# EAGLE board MMA8452_I2C_Panel (EAGLE 7.6.0)
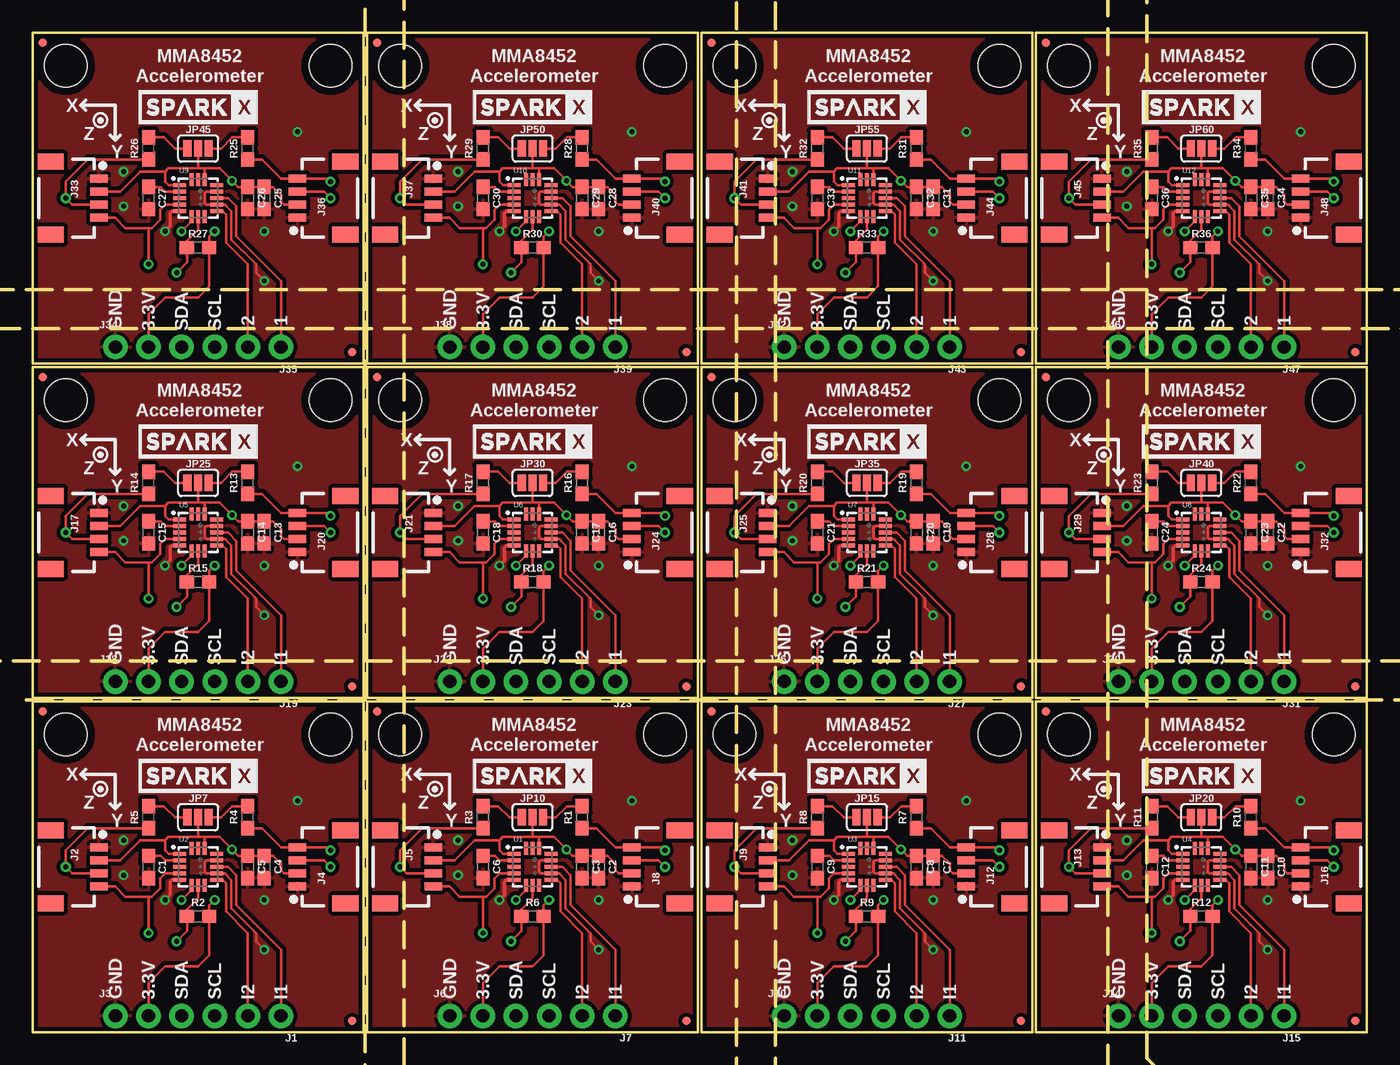
[diagram p0: board, top side]
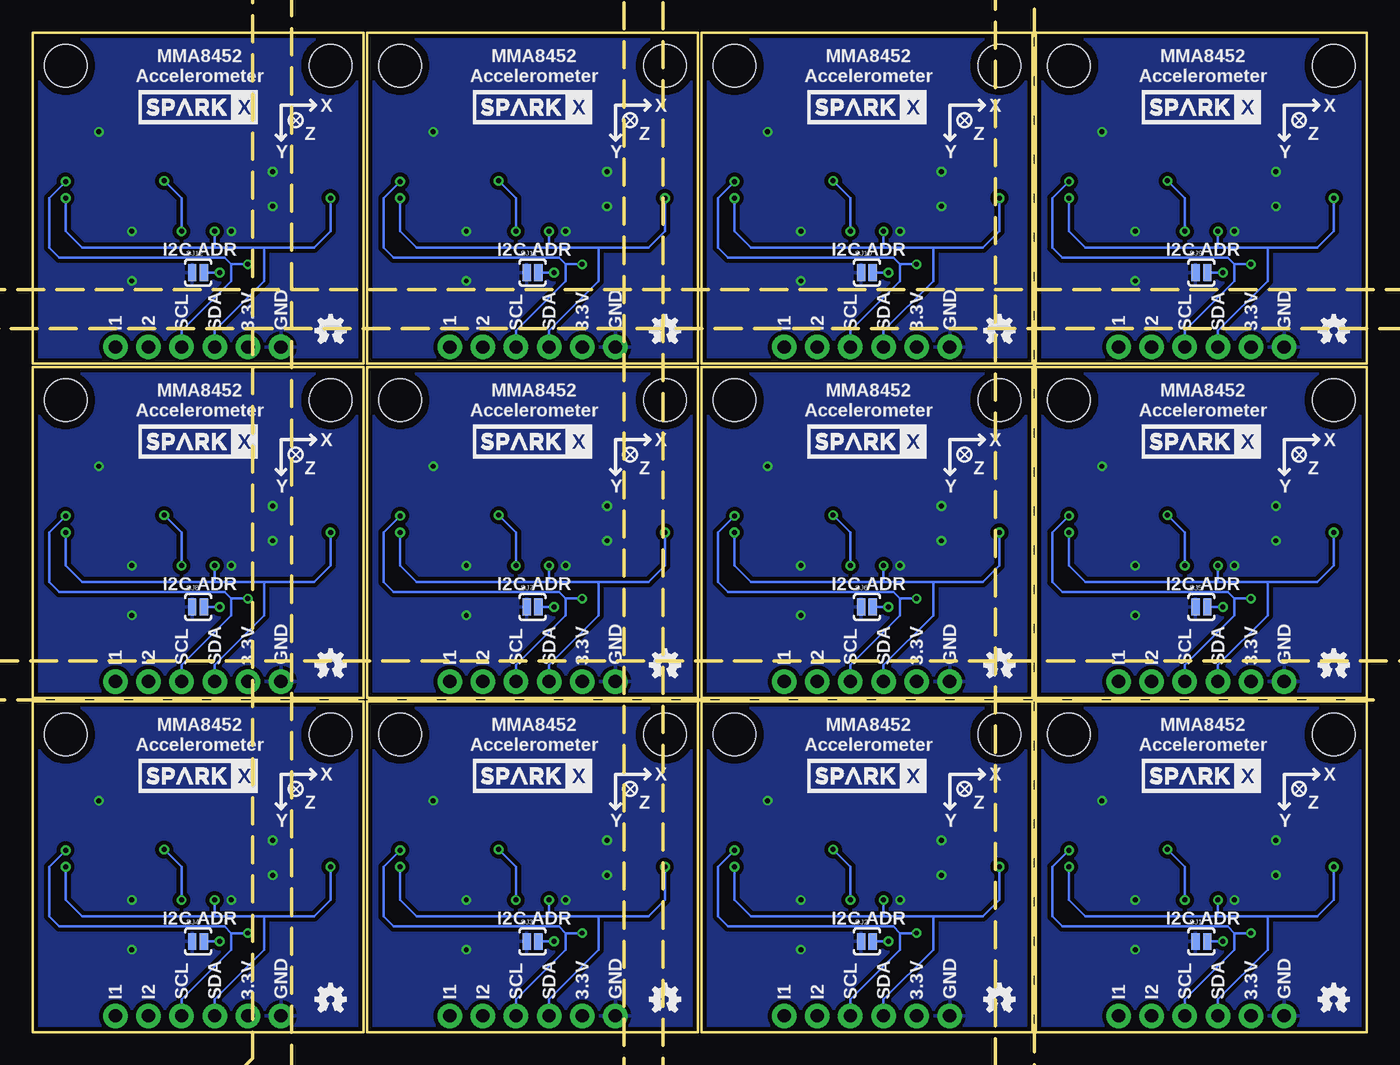
[diagram p1: board, bottom side, seen from below]

Size 102.37 x 76.71 mm. Coordinates in mm from the lower left corner, seen from the top.
Outline: 0,0 0,25.4 25.4,25.4 25.4,0 0,0
Outline: 25.66,0 25.66,25.4 51.05,25.4 51.05,0 25.66,0
Outline: 51.31,0 51.31,25.4 76.71,25.4 76.71,0 51.31,0
Outline: 76.97,0 76.97,25.4 102.37,25.4 102.37,0 76.97,0
Outline: 0,25.66 0,51.05 25.4,51.05 25.4,25.66 0,25.66
Outline: 25.66,25.66 25.66,51.05 51.05,51.05 51.05,25.66 25.66,25.66
Outline: 51.31,25.66 51.31,51.05 76.71,51.05 76.71,25.66 51.31,25.66
Outline: 76.97,25.66 76.97,51.05 102.37,51.05 102.37,25.66 76.97,25.66
Outline: 0,51.31 0,76.71 25.4,76.71 25.4,51.31 0,51.31
Outline: 25.66,51.31 25.66,76.71 51.05,76.71 51.05,51.31 25.66,51.31
Outline: 51.31,51.31 51.31,76.71 76.71,76.71 76.71,51.31 51.31,51.31
Outline: 76.97,51.31 76.97,76.71 102.37,76.71 102.37,51.31 76.97,51.31
Copper layers (1*16): Top 0.035mm / dielectric 1.5mm / Bottom 0.035mm
Design rules "SparkFun-2-layer-TIGHT": minimum track width 7mil, minimum drill 15mil, track to track 7mil, track to pad 7mil, pad to pad 7mil, via to via 7mil, smd to smd 7mil, copper to edge 7mil, drill to drill 7mil, minimum pad ring 7mil, minimum via ring 7mil, stop-mask expansion 4mil, vias tented up to drill 25mil, thermal gap 10mil
Milling: 359 lines

## Footprints (pad centres in the part's own frame; a part is rotated, then mirrored left to right if it is on the bottom)
0603 = smd 1.1 x 1: 1 -0.85,0; 2 0.85,0
1X02_NO_SILK = drill 1.016 pad 1.88: 1 0,0; 2 2.54,0
1X04_1MM_RA = smd 0.6 x 1.35: 1 -1.5,0; 2 -0.5,0; 3 0.5,0; 4 1.5,0 | smd 1.2 x 2: NC1 2.8,-3.675; NC2 -2.8,-3.675
1X04_NO_SILK = drill 1.016 pad 1.88: 1 0,0; 2 2.54,0; 3 5.08,0; 4 7.62,0
STAND-OFF = hole 3.302: 0,0
MICRO-FIDUCIAL = smd 0.635 x 0.635: 1 0,0
SMT-JUMPER_3_2-NC_PASTE_SILK = smd 0.635 x 1.27: 1 -0.813,0; 2 0,0; 3 0.813,0
SJ_2S-NO = smd 0.635 x 1.27: 1 -0.45,0; 2 0.45,0
QFN-16_0.5MM = smd 1 x 0.3: 1 -1.425,1; 2 -1.425,0.5; 3 -1.425,0; 4 -1.425,-0.5; 5 -1.425,-1; 9 1.425,-1; 10 1.425,-0.5; 11 1.425,0; 12 1.425,0.5; 13 1.425,1 | smd 0.3 x 1: 6 -0.5,-1.425; 7 0,-1.425; 8 0.5,-1.425; 14 0.5,1.425; 15 0,1.425; 16 -0.5,1.425

## Placement (x,y rotation side)
C1  0.1uF  [0603]  8.89,12.7 270 top
C2  0.1uF  [0603]  43.44,12.7 270 top
C3  4.7uF  [0603]  42.17,12.7 270 top
C4  0.1uF  [0603]  17.78,12.7 270 top
C5  4.7uF  [0603]  16.51,12.7 270 top
C6  0.1uF  [0603]  34.55,12.7 270 top
C7  0.1uF  [0603]  69.09,12.7 270 top
C8  4.7uF  [0603]  67.82,12.7 270 top
C9  0.1uF  [0603]  60.2,12.7 270 top
C10  0.1uF  [0603]  94.75,12.7 270 top
C11  4.7uF  [0603]  93.48,12.7 270 top
C12  0.1uF  [0603]  85.86,12.7 270 top
C13  0.1uF  [0603]  17.78,38.36 270 top
C14  4.7uF  [0603]  16.51,38.36 270 top
C15  0.1uF  [0603]  8.89,38.36 270 top
C16  0.1uF  [0603]  43.44,38.36 270 top
C17  4.7uF  [0603]  42.17,38.36 270 top
C18  0.1uF  [0603]  34.55,38.36 270 top
C19  0.1uF  [0603]  69.09,38.36 270 top
C20  4.7uF  [0603]  67.82,38.36 270 top
C21  0.1uF  [0603]  60.2,38.36 270 top
C22  0.1uF  [0603]  94.75,38.36 270 top
C23  4.7uF  [0603]  93.48,38.36 270 top
C24  0.1uF  [0603]  85.86,38.36 270 top
C25  0.1uF  [0603]  17.78,64.01 270 top
C26  4.7uF  [0603]  16.51,64.01 270 top
C27  0.1uF  [0603]  8.89,64.01 270 top
C28  0.1uF  [0603]  43.44,64.01 270 top
C29  4.7uF  [0603]  42.17,64.01 270 top
C30  0.1uF  [0603]  34.55,64.01 270 top
C31  0.1uF  [0603]  69.09,64.01 270 top
C32  4.7uF  [0603]  67.82,64.01 270 top
C33  0.1uF  [0603]  60.2,64.01 270 top
C34  0.1uF  [0603]  94.75,64.01 270 top
C35  4.7uF  [0603]  93.48,64.01 270 top
C36  0.1uF  [0603]  85.86,64.01 270 top
J1  [1X02_NO_SILK]  19.05,1.27 180 top
J2  SMD  [1X04_1MM_RA]  5.08,12.7 270 top
J3  PTH  [1X04_NO_SILK]  6.35,1.27 0 top
J4  SMD  [1X04_1MM_RA]  20.32,12.7 90 top
J5  SMD  [1X04_1MM_RA]  30.74,12.7 270 top
J6  PTH  [1X04_NO_SILK]  32.01,1.27 0 top
J7  [1X02_NO_SILK]  44.71,1.27 180 top
J8  SMD  [1X04_1MM_RA]  45.98,12.7 90 top
J9  SMD  [1X04_1MM_RA]  56.39,12.7 270 top
J10  PTH  [1X04_NO_SILK]  57.66,1.27 0 top
J11  [1X02_NO_SILK]  70.36,1.27 180 top
J12  SMD  [1X04_1MM_RA]  71.63,12.7 90 top
J13  SMD  [1X04_1MM_RA]  82.05,12.7 270 top
J14  PTH  [1X04_NO_SILK]  83.32,1.27 0 top
J15  [1X02_NO_SILK]  96.02,1.27 180 top
J16  SMD  [1X04_1MM_RA]  97.29,12.7 90 top
J17  SMD  [1X04_1MM_RA]  5.08,38.36 270 top
J18  PTH  [1X04_NO_SILK]  6.35,26.93 0 top
J19  [1X02_NO_SILK]  19.05,26.93 180 top
J20  SMD  [1X04_1MM_RA]  20.32,38.36 90 top
J21  SMD  [1X04_1MM_RA]  30.74,38.36 270 top
J22  PTH  [1X04_NO_SILK]  32.01,26.93 0 top
J23  [1X02_NO_SILK]  44.71,26.93 180 top
J24  SMD  [1X04_1MM_RA]  45.98,38.36 90 top
J25  SMD  [1X04_1MM_RA]  56.39,38.36 270 top
J26  PTH  [1X04_NO_SILK]  57.66,26.93 0 top
J27  [1X02_NO_SILK]  70.36,26.93 180 top
J28  SMD  [1X04_1MM_RA]  71.63,38.36 90 top
J29  SMD  [1X04_1MM_RA]  82.05,38.36 270 top
J30  PTH  [1X04_NO_SILK]  83.32,26.93 0 top
J31  [1X02_NO_SILK]  96.02,26.93 180 top
J32  SMD  [1X04_1MM_RA]  97.29,38.36 90 top
J33  SMD  [1X04_1MM_RA]  5.08,64.01 270 top
J34  PTH  [1X04_NO_SILK]  6.35,52.58 0 top
J35  [1X02_NO_SILK]  19.05,52.58 180 top
J36  SMD  [1X04_1MM_RA]  20.32,64.01 90 top
J37  SMD  [1X04_1MM_RA]  30.74,64.01 270 top
J38  PTH  [1X04_NO_SILK]  32.01,52.58 0 top
J39  [1X02_NO_SILK]  44.71,52.58 180 top
J40  SMD  [1X04_1MM_RA]  45.98,64.01 90 top
J41  SMD  [1X04_1MM_RA]  56.39,64.01 270 top
J42  PTH  [1X04_NO_SILK]  57.66,52.58 0 top
J43  [1X02_NO_SILK]  70.36,52.58 180 top
J44  SMD  [1X04_1MM_RA]  71.63,64.01 90 top
J45  SMD  [1X04_1MM_RA]  82.05,64.01 270 top
J46  PTH  [1X04_NO_SILK]  83.32,52.58 0 top
J47  [1X02_NO_SILK]  96.02,52.58 180 top
J48  SMD  [1X04_1MM_RA]  97.29,64.01 90 top
JP1  STAND-OFF  [STAND-OFF]  28.2,22.86 0 top
JP2  FIDUCIALUFIDUCIAL  [MICRO-FIDUCIAL]  24.51,0.89 0 top
JP3  STAND-OFF  [STAND-OFF]  2.54,22.86 0 top
JP4  STAND-OFF  [STAND-OFF]  22.86,22.86 0 top
JP5  STAND-OFF  [STAND-OFF]  48.52,22.86 0 top
JP6  FIDUCIALUFIDUCIAL  [MICRO-FIDUCIAL]  0.76,24.64 0 top
JP7  [SMT-JUMPER_3_2-NC_PASTE_SILK]  12.7,16.51 0 top
JP8  FIDUCIALUFIDUCIAL  [MICRO-FIDUCIAL]  50.17,0.89 0 top
JP9  FIDUCIALUFIDUCIAL  [MICRO-FIDUCIAL]  26.42,24.64 0 top
JP10  [SMT-JUMPER_3_2-NC_PASTE_SILK]  38.36,16.51 0 top
JP11  STAND-OFF  [STAND-OFF]  53.85,22.86 0 top
JP12  STAND-OFF  [STAND-OFF]  74.17,22.86 0 top
JP13  FIDUCIALUFIDUCIAL  [MICRO-FIDUCIAL]  75.82,0.89 0 top
JP14  FIDUCIALUFIDUCIAL  [MICRO-FIDUCIAL]  52.07,24.64 0 top
JP15  [SMT-JUMPER_3_2-NC_PASTE_SILK]  64.01,16.51 0 top
JP16  STAND-OFF  [STAND-OFF]  79.51,22.86 0 top
JP17  STAND-OFF  [STAND-OFF]  99.83,22.86 0 top
JP18  FIDUCIALUFIDUCIAL  [MICRO-FIDUCIAL]  101.48,0.89 0 top
JP19  FIDUCIALUFIDUCIAL  [MICRO-FIDUCIAL]  77.73,24.64 0 top
JP20  [SMT-JUMPER_3_2-NC_PASTE_SILK]  89.67,16.51 0 top
JP21  STAND-OFF  [STAND-OFF]  2.54,48.52 0 top
JP22  STAND-OFF  [STAND-OFF]  22.86,48.52 0 top
JP23  FIDUCIALUFIDUCIAL  [MICRO-FIDUCIAL]  24.51,26.54 0 top
JP24  FIDUCIALUFIDUCIAL  [MICRO-FIDUCIAL]  0.76,50.29 0 top
JP25  [SMT-JUMPER_3_2-NC_PASTE_SILK]  12.7,42.17 0 top
JP26  STAND-OFF  [STAND-OFF]  28.2,48.52 0 top
JP27  STAND-OFF  [STAND-OFF]  48.52,48.52 0 top
JP28  FIDUCIALUFIDUCIAL  [MICRO-FIDUCIAL]  50.17,26.54 0 top
JP29  FIDUCIALUFIDUCIAL  [MICRO-FIDUCIAL]  26.42,50.29 0 top
JP30  [SMT-JUMPER_3_2-NC_PASTE_SILK]  38.36,42.17 0 top
JP31  STAND-OFF  [STAND-OFF]  53.85,48.52 0 top
JP32  STAND-OFF  [STAND-OFF]  74.17,48.52 0 top
JP33  FIDUCIALUFIDUCIAL  [MICRO-FIDUCIAL]  75.82,26.54 0 top
JP34  FIDUCIALUFIDUCIAL  [MICRO-FIDUCIAL]  52.07,50.29 0 top
JP35  [SMT-JUMPER_3_2-NC_PASTE_SILK]  64.01,42.17 0 top
JP36  STAND-OFF  [STAND-OFF]  79.51,48.52 0 top
JP37  STAND-OFF  [STAND-OFF]  99.83,48.52 0 top
JP38  FIDUCIALUFIDUCIAL  [MICRO-FIDUCIAL]  101.48,26.54 0 top
JP39  FIDUCIALUFIDUCIAL  [MICRO-FIDUCIAL]  77.73,50.29 0 top
JP40  [SMT-JUMPER_3_2-NC_PASTE_SILK]  89.67,42.17 0 top
JP41  STAND-OFF  [STAND-OFF]  2.54,74.17 0 top
JP42  STAND-OFF  [STAND-OFF]  22.86,74.17 0 top
JP43  FIDUCIALUFIDUCIAL  [MICRO-FIDUCIAL]  24.51,52.2 0 top
JP44  FIDUCIALUFIDUCIAL  [MICRO-FIDUCIAL]  0.76,75.95 0 top
JP45  [SMT-JUMPER_3_2-NC_PASTE_SILK]  12.7,67.82 0 top
JP46  STAND-OFF  [STAND-OFF]  28.2,74.17 0 top
JP47  STAND-OFF  [STAND-OFF]  48.52,74.17 0 top
JP48  FIDUCIALUFIDUCIAL  [MICRO-FIDUCIAL]  50.17,52.2 0 top
JP49  FIDUCIALUFIDUCIAL  [MICRO-FIDUCIAL]  26.42,75.95 0 top
JP50  [SMT-JUMPER_3_2-NC_PASTE_SILK]  38.36,67.82 0 top
JP51  STAND-OFF  [STAND-OFF]  53.85,74.17 0 top
JP52  STAND-OFF  [STAND-OFF]  74.17,74.17 0 top
JP53  FIDUCIALUFIDUCIAL  [MICRO-FIDUCIAL]  75.82,52.2 0 top
JP54  FIDUCIALUFIDUCIAL  [MICRO-FIDUCIAL]  52.07,75.95 0 top
JP55  [SMT-JUMPER_3_2-NC_PASTE_SILK]  64.01,67.82 0 top
JP56  STAND-OFF  [STAND-OFF]  79.51,74.17 0 top
JP57  STAND-OFF  [STAND-OFF]  99.83,74.17 0 top
JP58  FIDUCIALUFIDUCIAL  [MICRO-FIDUCIAL]  101.48,52.2 0 top
JP59  FIDUCIALUFIDUCIAL  [MICRO-FIDUCIAL]  77.73,75.95 0 top
JP60  [SMT-JUMPER_3_2-NC_PASTE_SILK]  89.67,67.82 0 top
LOGO1  OSHW-LOGOMINI  [OSHW-LOGO-MINI]  2.54,2.54 0 bottom
LOGO2  OSHW-LOGOMINI  [OSHW-LOGO-MINI]  28.2,2.54 0 bottom
LOGO3  OSHW-LOGOMINI  [OSHW-LOGO-MINI]  53.85,2.54 0 bottom
LOGO4  OSHW-LOGOMINI  [OSHW-LOGO-MINI]  79.51,2.54 0 bottom
LOGO5  OSHW-LOGOMINI  [OSHW-LOGO-MINI]  2.54,28.2 0 bottom
LOGO6  OSHW-LOGOMINI  [OSHW-LOGO-MINI]  28.2,28.2 0 bottom
LOGO7  OSHW-LOGOMINI  [OSHW-LOGO-MINI]  53.85,28.2 0 bottom
LOGO8  OSHW-LOGOMINI  [OSHW-LOGO-MINI]  79.51,28.2 0 bottom
LOGO9  OSHW-LOGOMINI  [OSHW-LOGO-MINI]  2.54,53.85 0 bottom
LOGO10  OSHW-LOGOMINI  [OSHW-LOGO-MINI]  28.2,53.85 0 bottom
LOGO11  OSHW-LOGOMINI  [OSHW-LOGO-MINI]  53.85,53.85 0 bottom
LOGO12  OSHW-LOGOMINI  [OSHW-LOGO-MINI]  79.51,53.85 0 bottom
R1  4.7k  [0603]  42.17,16.51 90 top
R2  10k  [0603]  12.7,8.89 0 top
R3  4.7k  [0603]  34.55,16.51 90 top
R4  4.7k  [0603]  16.51,16.51 90 top
R5  4.7k  [0603]  8.89,16.51 90 top
R6  10k  [0603]  38.36,8.89 0 top
R7  4.7k  [0603]  67.82,16.51 90 top
R8  4.7k  [0603]  60.2,16.51 90 top
R9  10k  [0603]  64.01,8.89 0 top
R10  4.7k  [0603]  93.48,16.51 90 top
R11  4.7k  [0603]  85.86,16.51 90 top
R12  10k  [0603]  89.67,8.89 0 top
R13  4.7k  [0603]  16.51,42.17 90 top
R14  4.7k  [0603]  8.89,42.17 90 top
R15  10k  [0603]  12.7,34.55 0 top
R16  4.7k  [0603]  42.17,42.17 90 top
R17  4.7k  [0603]  34.55,42.17 90 top
R18  10k  [0603]  38.36,34.55 0 top
R19  4.7k  [0603]  67.82,42.17 90 top
R20  4.7k  [0603]  60.2,42.17 90 top
R21  10k  [0603]  64.01,34.55 0 top
R22  4.7k  [0603]  93.48,42.17 90 top
R23  4.7k  [0603]  85.86,42.17 90 top
R24  10k  [0603]  89.67,34.55 0 top
R25  4.7k  [0603]  16.51,67.82 90 top
R26  4.7k  [0603]  8.89,67.82 90 top
R27  10k  [0603]  12.7,60.2 0 top
R28  4.7k  [0603]  42.17,67.82 90 top
R29  4.7k  [0603]  34.55,67.82 90 top
R30  10k  [0603]  38.36,60.2 0 top
R31  4.7k  [0603]  67.82,67.82 90 top
R32  4.7k  [0603]  60.2,67.82 90 top
R33  10k  [0603]  64.01,60.2 0 top
R34  4.7k  [0603]  93.48,67.82 90 top
R35  4.7k  [0603]  85.86,67.82 90 top
R36  10k  [0603]  89.67,60.2 0 top
SJ1  [SJ_2S-NO]  12.7,6.99 0 bottom
SJ2  [SJ_2S-NO]  38.36,6.99 0 bottom
SJ3  [SJ_2S-NO]  64.01,6.99 0 bottom
SJ4  [SJ_2S-NO]  89.67,6.99 0 bottom
SJ5  [SJ_2S-NO]  12.7,32.64 0 bottom
SJ6  [SJ_2S-NO]  38.36,32.64 0 bottom
SJ7  [SJ_2S-NO]  64.01,32.64 0 bottom
SJ8  [SJ_2S-NO]  89.67,32.64 0 bottom
SJ9  [SJ_2S-NO]  12.7,58.3 0 bottom
SJ10  [SJ_2S-NO]  38.36,58.3 0 bottom
SJ11  [SJ_2S-NO]  64.01,58.3 0 bottom
SJ12  [SJ_2S-NO]  89.67,58.3 0 bottom
U1  MMA8452Q  [QFN-16_0.5MM]  38.36,12.7 0 top
U2  MMA8452Q  [QFN-16_0.5MM]  12.7,12.7 0 top
U3  MMA8452Q  [QFN-16_0.5MM]  64.01,12.7 0 top
U4  MMA8452Q  [QFN-16_0.5MM]  89.67,12.7 0 top
U5  MMA8452Q  [QFN-16_0.5MM]  12.7,38.36 0 top
U6  MMA8452Q  [QFN-16_0.5MM]  38.36,38.36 0 top
U7  MMA8452Q  [QFN-16_0.5MM]  64.01,38.36 0 top
U8  MMA8452Q  [QFN-16_0.5MM]  89.67,38.36 0 top
U9  MMA8452Q  [QFN-16_0.5MM]  12.7,64.01 0 top
U10  MMA8452Q  [QFN-16_0.5MM]  38.36,64.01 0 top
U11  MMA8452Q  [QFN-16_0.5MM]  64.01,64.01 0 top
U12  MMA8452Q  [QFN-16_0.5MM]  89.67,64.01 0 top
U$1  SPARKX-LOGO4  [SPARKX-MEDIUM]  12.7,19.68 0 bottom
U$2  SPARKX-LOGO4  [SPARKX-MEDIUM]  12.7,19.68 0 top
U$3  SPARKX-LOGO4  [SPARKX-MEDIUM]  38.36,19.68 0 top
U$4  SPARKX-LOGO4  [SPARKX-MEDIUM]  38.36,19.68 0 bottom
U$5  SPARKX-LOGO4  [SPARKX-MEDIUM]  64.01,19.68 0 top
U$6  SPARKX-LOGO4  [SPARKX-MEDIUM]  64.01,19.68 0 bottom
U$7  SPARKX-LOGO4  [SPARKX-MEDIUM]  89.67,19.68 0 top
U$8  SPARKX-LOGO4  [SPARKX-MEDIUM]  89.67,19.68 0 bottom
U$9  SPARKX-LOGO4  [SPARKX-MEDIUM]  12.7,45.34 0 top
U$10  SPARKX-LOGO4  [SPARKX-MEDIUM]  12.7,45.34 0 bottom
U$11  SPARKX-LOGO4  [SPARKX-MEDIUM]  38.36,45.34 0 top
U$12  SPARKX-LOGO4  [SPARKX-MEDIUM]  38.36,45.34 0 bottom
U$13  SPARKX-LOGO4  [SPARKX-MEDIUM]  64.01,45.34 0 top
U$14  SPARKX-LOGO4  [SPARKX-MEDIUM]  64.01,45.34 0 bottom
U$15  SPARKX-LOGO4  [SPARKX-MEDIUM]  89.67,45.34 0 top
U$16  SPARKX-LOGO4  [SPARKX-MEDIUM]  89.67,45.34 0 bottom
U$17  SPARKX-LOGO4  [SPARKX-MEDIUM]  12.7,71 0 top
U$18  SPARKX-LOGO4  [SPARKX-MEDIUM]  12.7,71 0 bottom
U$19  SPARKX-LOGO4  [SPARKX-MEDIUM]  38.36,71 0 top
U$20  SPARKX-LOGO4  [SPARKX-MEDIUM]  38.36,71 0 bottom
U$21  SPARKX-LOGO4  [SPARKX-MEDIUM]  64.01,71 0 top
U$22  SPARKX-LOGO4  [SPARKX-MEDIUM]  64.01,71 0 bottom
U$23  SPARKX-LOGO4  [SPARKX-MEDIUM]  89.67,71 0 top
U$24  SPARKX-LOGO4  [SPARKX-MEDIUM]  89.67,71 0 bottom

## Library data of the parts
C1 C2 C4 C6 C7 C9 C10 C12 C13 C15 C16 C18 C19 C21 C22 C24 C25 C27 C28 C30 C31 C33 C34 C36 = SparkFun-Capacitors; PROD_ID: CAP-00810
C3 C5 C8 C11 C14 C17 C20 C23 C26 C29 C32 C35 = SparkFun-Capacitors; PROD_ID: CAP-08280
J1 J7 J11 J15 J19 J23 J27 J31 J35 J39 J43 J47 = SparkFun-Connectors
J2-J6 J8-J10 J12-J14 J16-J18 J20-J22 J24-J26 J28-J30 J32-J34 J36-J38 J40-J42 J44-J46 J48 U1-U12 U$1-U$24 = SparkX
JP1-JP6 JP8 JP9 JP11-JP14 JP16-JP19 JP21-JP24 JP26-JP29 JP31-JP34 JP36-JP39 JP41-JP44 JP46-JP49 JP51-JP54 JP56-JP59 SJ1-SJ12 = SparkFun
JP7 JP10 JP15 JP20 JP25 JP30 JP35 JP40 JP45 JP50 JP55 JP60 = SparkFun-Jumpers
LOGO1-LOGO12 = SparkFun-Aesthetics
R1 R3-R5 R7 R8 R10 R11 R13 R14 R16 R17 R19 R20 R22 R23 R25 R26 R28 R29 R31 R32 R34 R35 = SparkFun-Resistors; PROD_ID: RES-07857
R2 R6 R9 R12 R15 R18 R21 R24 R27 R30 R33 R36 = SparkFun-Resistors; PROD_ID: RES-00824

## Nets
3.3V: C4.1 C5.1 J2.2 J3.2 J4.2 JP7.2 R2.2 U2.1 U2.14
3.3V1: C2.1 C3.1 J5.2 J6.2 J8.2 JP10.2 R6.2 U1.1 U1.14
3.3V2: C7.1 C8.1 J9.2 J10.2 J12.2 JP15.2 R9.2 U3.1 U3.14
3.3V3: C10.1 C11.1 J13.2 J14.2 J16.2 JP20.2 R12.2 U4.1 U4.14
3.3V4: C13.1 C14.1 J17.2 J18.2 J20.2 JP25.2 R15.2 U5.1 U5.14
3.3V5: C16.1 C17.1 J21.2 J22.2 J24.2 JP30.2 R18.2 U6.1 U6.14
3.3V6: C19.1 C20.1 J25.2 J26.2 J28.2 JP35.2 R21.2 U7.1 U7.14
3.3V7: C22.1 C23.1 J29.2 J30.2 J32.2 JP40.2 R24.2 U8.1 U8.14
3.3V8: C25.1 C26.1 J33.2 J34.2 J36.2 JP45.2 R27.2 U9.1 U9.14
3.3V9: C28.1 C29.1 J37.2 J38.2 J40.2 JP50.2 R30.2 U10.1 U10.14
3.3V10: C31.1 C32.1 J41.2 J42.2 J44.2 JP55.2 R33.2 U11.1 U11.14
3.3V11: C34.1 C35.1 J45.2 J46.2 J48.2 JP60.2 R36.2 U12.1 U12.14
BYP: C1.1 U2.2
BYP1: C6.1 U1.2
BYP2: C9.1 U3.2
BYP3: C12.1 U4.2
BYP4: C15.1 U5.2
BYP5: C18.1 U6.2
BYP6: C21.1 U7.2
BYP7: C24.1 U8.2
BYP8: C27.1 U9.2
BYP9: C30.1 U10.2
BYP10: C33.1 U11.2
BYP11: C36.1 U12.2
GND: C1.2 C4.2 C5.2 J2.1 J3.1 J4.1 SJ1.1 U2.5 U2.10 U2.12
GND1: C2.2 C3.2 C6.2 J5.1 J6.1 J8.1 SJ2.1 U1.5 U1.10 U1.12
GND2: C7.2 C8.2 C9.2 J9.1 J10.1 J12.1 SJ3.1 U3.5 U3.10 U3.12
GND3: C10.2 C11.2 C12.2 J13.1 J14.1 J16.1 SJ4.1 U4.5 U4.10 U4.12
GND4: C13.2 C14.2 C15.2 J17.1 J18.1 J20.1 SJ5.1 U5.5 U5.10 U5.12
GND5: C16.2 C17.2 C18.2 J21.1 J22.1 J24.1 SJ6.1 U6.5 U6.10 U6.12
GND6: C19.2 C20.2 C21.2 J25.1 J26.1 J28.1 SJ7.1 U7.5 U7.10 U7.12
GND7: C22.2 C23.2 C24.2 J29.1 J30.1 J32.1 SJ8.1 U8.5 U8.10 U8.12
GND8: C25.2 C26.2 C27.2 J33.1 J34.1 J36.1 SJ9.1 U9.5 U9.10 U9.12
GND9: C28.2 C29.2 C30.2 J37.1 J38.1 J40.1 SJ10.1 U10.5 U10.10 U10.12
GND10: C31.2 C32.2 C33.2 J41.1 J42.1 J44.1 SJ11.1 U11.5 U11.10 U11.12
GND11: C34.2 C35.2 C36.2 J45.1 J46.1 J48.1 SJ12.1 U12.5 U12.10 U12.12
INT1: J1.1 U2.11
INT2: J1.2 U2.9
INT3: J7.2 U1.9
INT4: J7.1 U1.11
INT5: J11.2 U3.9
INT6: J11.1 U3.11
INT7: J15.2 U4.9
INT8: J15.1 U4.11
INT9: J19.2 U5.9
INT10: J19.1 U5.11
INT11: J23.2 U6.9
INT12: J23.1 U6.11
INT13: J27.2 U7.9
INT14: J27.1 U7.11
INT15: J31.2 U8.9
INT16: J31.1 U8.11
INT17: J35.2 U9.9
INT18: J35.1 U9.11
INT19: J39.2 U10.9
INT20: J39.1 U10.11
INT21: J43.2 U11.9
INT22: J43.1 U11.11
INT23: J47.2 U12.9
INT24: J47.1 U12.11
N$1: JP7.1 R5.2
N$2: JP7.3 R4.2
N$3: JP10.1 R3.2
N$4: JP10.3 R1.2
N$5: JP15.1 R8.2
N$6: JP15.3 R7.2
N$7: JP20.1 R11.2
N$8: JP20.3 R10.2
N$9: JP25.1 R14.2
N$10: JP25.3 R13.2
N$11: JP30.1 R17.2
N$12: JP30.3 R16.2
N$13: JP35.1 R20.2
N$14: JP35.3 R19.2
N$15: JP40.1 R23.2
N$16: JP40.3 R22.2
N$17: JP45.1 R26.2
N$18: JP45.3 R25.2
N$19: JP50.1 R29.2
N$20: JP50.3 R28.2
N$21: JP55.1 R32.2
N$22: JP55.3 R31.2
N$23: JP60.1 R35.2
N$24: JP60.3 R34.2
SA0: R2.1 SJ1.2 U2.7
SA1: R6.1 SJ2.2 U1.7
SA2: R9.1 SJ3.2 U3.7
SA3: R12.1 SJ4.2 U4.7
SA4: R15.1 SJ5.2 U5.7
SA5: R18.1 SJ6.2 U6.7
SA6: R21.1 SJ7.2 U7.7
SA7: R24.1 SJ8.2 U8.7
SA8: R27.1 SJ9.2 U9.7
SA9: R30.1 SJ10.2 U10.7
SA10: R33.1 SJ11.2 U11.7
SA11: R36.1 SJ12.2 U12.7
SCL: J2.4 J3.4 J4.4 R4.1 U2.4
SCL1: J5.4 J6.4 J8.4 R1.1 U1.4
SCL2: J9.4 J10.4 J12.4 R7.1 U3.4
SCL3: J13.4 J14.4 J16.4 R10.1 U4.4
SCL4: J17.4 J18.4 J20.4 R13.1 U5.4
SCL5: J21.4 J22.4 J24.4 R16.1 U6.4
SCL6: J25.4 J26.4 J28.4 R19.1 U7.4
SCL7: J29.4 J30.4 J32.4 R22.1 U8.4
SCL8: J33.4 J34.4 J36.4 R25.1 U9.4
SCL9: J37.4 J38.4 J40.4 R28.1 U10.4
SCL10: J41.4 J42.4 J44.4 R31.1 U11.4
SCL11: J45.4 J46.4 J48.4 R34.1 U12.4
SDA: J2.3 J3.3 J4.3 R5.1 U2.6
SDA1: J5.3 J6.3 J8.3 R3.1 U1.6
SDA2: J9.3 J10.3 J12.3 R8.1 U3.6
SDA3: J13.3 J14.3 J16.3 R11.1 U4.6
SDA4: J17.3 J18.3 J20.3 R14.1 U5.6
SDA5: J21.3 J22.3 J24.3 R17.1 U6.6
SDA6: J25.3 J26.3 J28.3 R20.1 U7.6
SDA7: J29.3 J30.3 J32.3 R23.1 U8.6
SDA8: J33.3 J34.3 J36.3 R26.1 U9.6
SDA9: J37.3 J38.3 J40.3 R29.1 U10.6
SDA10: J41.3 J42.3 J44.3 R32.1 U11.6
SDA11: J45.3 J46.3 J48.3 R35.1 U12.6

## Tracks (layer width: path | path; a pad name or v marks a point on that pad's centre or on a via)
3.3V  (via drill 0.38)
  Top 0.178: J4.2 19.3,12.2 19.05,12.45 19.05,12.95 18.45,13.55 C4.1 C5.1 15.79,13.55 v15.3,14.03 14.35,14.99 13.21,14.99 | 10.16,14.73 8.26,14.73 6.72,13.2 J2.2 | U2.1 10.43,13.7 10.16,13.97 10.16,14.73 | v13.97,10.16 13.55,9.74 R2.2 13.55,5.93 12.7,5.08 10.16,5.08 8.89,3.81 J3.2 | 13.21,14.99 12.7,14.99 | 12.7,14.99 10.41,14.99 10.16,14.73 | U2.14 13.2,14.98 13.21,14.99 | JP7.2 12.7,14.99
  Bottom 0.178: v13.97,10.16 13.97,12.7 v15.3,14.03
3.3V1  (via drill 0.38)
  Top 0.178: J8.2 44.95,12.2 44.7,12.45 44.7,12.95 44.11,13.55 C2.1 C3.1 41.44,13.55 v40.96,14.03 40.01,14.99 38.86,14.99 | 35.81,14.73 33.91,14.73 32.38,13.2 J5.2 | U1.1 36.09,13.7 35.81,13.97 35.81,14.73 | v39.62,10.16 39.2,9.74 R6.2 39.2,5.93 38.35,5.08 35.81,5.08 34.55,3.81 J6.2 | 38.86,14.99 38.35,14.99 | 38.35,14.99 36.07,14.99 35.81,14.73 | U1.14 38.85,14.98 38.86,14.99 | JP10.2 38.35,14.99
  Bottom 0.178: v39.62,10.16 39.62,12.7 v40.96,14.03
3.3V2  (via drill 0.38)
  Top 0.178: J12.2 70.61,12.2 70.36,12.45 70.36,12.95 69.76,13.55 C7.1 C8.1 67.1,13.55 v66.61,14.03 65.66,14.99 64.52,14.99 | 61.47,14.73 59.56,14.73 58.03,13.2 J9.2 | U3.1 61.74,13.7 61.47,13.97 61.47,14.73 | v65.28,10.16 64.86,9.74 R9.2 64.86,5.93 64.01,5.08 61.47,5.08 60.2,3.81 J10.2 | 64.52,14.99 64.01,14.99 | 64.01,14.99 61.72,14.99 61.47,14.73 | U3.14 64.51,14.98 64.52,14.99 | JP15.2 64.01,14.99
  Bottom 0.178: v65.28,10.16 65.28,12.7 v66.61,14.03
3.3V3  (via drill 0.38)
  Top 0.178: J16.2 96.26,12.2 96.02,12.45 96.02,12.95 95.42,13.55 C10.1 C11.1 92.75,13.55 v92.27,14.03 91.32,14.99 90.17,14.99 | 87.13,14.73 85.22,14.73 83.69,13.2 J13.2 | U4.1 87.4,13.7 87.13,13.97 87.13,14.73 | v90.94,10.16 90.52,9.74 R12.2 90.52,5.93 89.67,5.08 87.13,5.08 85.86,3.81 J14.2 | 90.17,14.99 89.67,14.99 | 89.67,14.99 87.38,14.99 87.13,14.73 | U4.14 90.17,14.98 90.17,14.99 | JP20.2 89.67,14.99
  Bottom 0.178: v90.94,10.16 90.94,12.7 v92.27,14.03
3.3V4  (via drill 0.38)
  Top 0.178: J20.2 19.3,37.85 19.05,38.1 19.05,38.61 18.45,39.2 C13.1 C14.1 15.79,39.2 v15.3,39.69 14.35,40.64 13.21,40.64 | 10.16,40.39 8.26,40.39 6.72,38.85 J17.2 | U5.1 10.43,39.35 10.16,39.62 10.16,40.39 | v13.97,35.81 13.55,35.4 R15.2 13.55,31.59 12.7,30.73 10.16,30.73 8.89,29.46 J18.2 | 13.21,40.64 12.7,40.64 | 12.7,40.64 10.41,40.64 10.16,40.39 | U5.14 13.2,40.63 13.21,40.64 | JP25.2 12.7,40.64
  Bottom 0.178: v13.97,35.81 13.97,38.35 v15.3,39.69
3.3V5  (via drill 0.38)
  Top 0.178: J24.2 44.95,37.85 44.7,38.1 44.7,38.61 44.11,39.2 C16.1 C17.1 41.44,39.2 v40.96,39.69 40.01,40.64 38.86,40.64 | 35.81,40.39 33.91,40.39 32.38,38.85 J21.2 | U6.1 36.09,39.35 35.81,39.62 35.81,40.39 | v39.62,35.81 39.2,35.4 R18.2 39.2,31.59 38.35,30.73 35.81,30.73 34.55,29.46 J22.2 | 38.86,40.64 38.35,40.64 | 38.35,40.64 36.07,40.64 35.81,40.39 | U6.14 38.85,40.63 38.86,40.64 | JP30.2 38.35,40.64
  Bottom 0.178: v39.62,35.81 39.62,38.35 v40.96,39.69
3.3V6  (via drill 0.38)
  Top 0.178: J28.2 70.61,37.85 70.36,38.1 70.36,38.61 69.76,39.2 C19.1 C20.1 67.1,39.2 v66.61,39.69 65.66,40.64 64.52,40.64 | 61.47,40.39 59.56,40.39 58.03,38.85 J25.2 | U7.1 61.74,39.35 61.47,39.62 61.47,40.39 | v65.28,35.81 64.86,35.4 R21.2 64.86,31.59 64.01,30.73 61.47,30.73 60.2,29.46 J26.2 | 64.52,40.64 64.01,40.64 | 64.01,40.64 61.72,40.64 61.47,40.39 | U7.14 64.51,40.63 64.52,40.64 | JP35.2 64.01,40.64
  Bottom 0.178: v65.28,35.81 65.28,38.35 v66.61,39.69
3.3V7  (via drill 0.38)
  Top 0.178: J32.2 96.26,37.85 96.02,38.1 96.02,38.61 95.42,39.2 C22.1 C23.1 92.75,39.2 v92.27,39.69 91.32,40.64 90.17,40.64 | 87.13,40.39 85.22,40.39 83.69,38.85 J29.2 | U8.1 87.4,39.35 87.13,39.62 87.13,40.39 | v90.94,35.81 90.52,35.4 R24.2 90.52,31.59 89.67,30.73 87.13,30.73 85.86,29.46 J30.2 | 90.17,40.64 89.67,40.64 | 89.67,40.64 87.38,40.64 87.13,40.39 | U8.14 90.17,40.63 90.17,40.64 | JP40.2 89.67,40.64
  Bottom 0.178: v90.94,35.81 90.94,38.35 v92.27,39.69
3.3V8  (via drill 0.38)
  Top 0.178: J36.2 19.3,63.51 19.05,63.76 19.05,64.26 18.45,64.86 C25.1 C26.1 15.79,64.86 v15.3,65.34 14.35,66.3 13.21,66.3 | 10.16,66.04 8.26,66.04 6.72,64.51 J33.2 | U9.1 10.43,65.01 10.16,65.28 10.16,66.04 | v13.97,61.47 13.55,61.05 R27.2 13.55,57.24 12.7,56.39 10.16,56.39 8.89,55.12 J34.2 | 13.21,66.3 12.7,66.3 | 12.7,66.3 10.41,66.3 10.16,66.04 | U9.14 13.2,66.29 13.21,66.3 | JP45.2 12.7,66.3
  Bottom 0.178: v13.97,61.47 13.97,64.01 v15.3,65.34
3.3V9  (via drill 0.38)
  Top 0.178: J40.2 44.95,63.51 44.7,63.76 44.7,64.26 44.11,64.86 C28.1 C29.1 41.44,64.86 v40.96,65.34 40.01,66.3 38.86,66.3 | 35.81,66.04 33.91,66.04 32.38,64.51 J37.2 | U10.1 36.09,65.01 35.81,65.28 35.81,66.04 | v39.62,61.47 39.2,61.05 R30.2 39.2,57.24 38.35,56.39 35.81,56.39 34.55,55.12 J38.2 | 38.86,66.3 38.35,66.3 | 38.35,66.3 36.07,66.3 35.81,66.04 | U10.14 38.85,66.29 38.86,66.3 | JP50.2 38.35,66.3
  Bottom 0.178: v39.62,61.47 39.62,64.01 v40.96,65.34
3.3V10  (via drill 0.38)
  Top 0.178: J44.2 70.61,63.51 70.36,63.76 70.36,64.26 69.76,64.86 C31.1 C32.1 67.1,64.86 v66.61,65.34 65.66,66.3 64.52,66.3 | 61.47,66.04 59.56,66.04 58.03,64.51 J41.2 | U11.1 61.74,65.01 61.47,65.28 61.47,66.04 | v65.28,61.47 64.86,61.05 R33.2 64.86,57.24 64.01,56.39 61.47,56.39 60.2,55.12 J42.2 | 64.52,66.3 64.01,66.3 | 64.01,66.3 61.72,66.3 61.47,66.04 | U11.14 64.51,66.29 64.52,66.3 | JP55.2 64.01,66.3
  Bottom 0.178: v65.28,61.47 65.28,64.01 v66.61,65.34
3.3V11  (via drill 0.38)
  Top 0.178: J48.2 96.26,63.51 96.02,63.76 96.02,64.26 95.42,64.86 C34.1 C35.1 92.75,64.86 v92.27,65.34 91.32,66.3 90.17,66.3 | 87.13,66.04 85.22,66.04 83.69,64.51 J45.2 | U12.1 87.4,65.01 87.13,65.28 87.13,66.04 | v90.94,61.47 90.52,61.05 R36.2 90.52,57.24 89.67,56.39 87.13,56.39 85.86,55.12 J46.2 | 90.17,66.3 89.67,66.3 | 89.67,66.3 87.38,66.3 87.13,66.04 | U12.14 90.17,66.29 90.17,66.3 | JP60.2 89.67,66.3
  Bottom 0.178: v90.94,61.47 90.94,64.01 v92.27,65.34
BYP
  Top 0.178: U2.2 10.17,13.2 9.82,13.55 C1.1
BYP1
  Top 0.178: U1.2 35.82,13.2 35.47,13.55 C6.1
BYP2
  Top 0.178: U3.2 61.48,13.2 61.13,13.55 C9.1
BYP3
  Top 0.178: U4.2 87.13,13.2 86.78,13.55 C12.1
BYP4
  Top 0.178: U5.2 10.17,38.85 9.82,39.2 C15.1
BYP5
  Top 0.178: U6.2 35.82,38.85 35.47,39.2 C18.1
BYP6
  Top 0.178: U7.2 61.48,38.85 61.13,39.2 C21.1
BYP7
  Top 0.178: U8.2 87.13,38.85 86.78,39.2 C24.1
BYP8
  Top 0.178: U9.2 10.17,64.51 9.82,64.86 C27.1
BYP9
  Top 0.178: U10.2 35.82,64.51 35.47,64.86 C30.1
BYP10
  Top 0.178: U11.2 61.48,64.51 61.13,64.86 C33.1
BYP11
  Top 0.178: U12.2 87.13,64.51 86.78,64.86 C36.1
GND  (via drill 0.38)
  Top 0.178: v17.78,6.35 17.14,6.99 17.14,7.62 15.24,9.53 15.24,11.68 14.72,12.2 U2.10 13.33,12.2 13.21,12.32 13.21,13.08 13.33,13.2 U2.12
  Top 0.254: U2.5 10.68,11.7 10.54,11.56 10.54,10.54 v10.16,10.16
  other vias: 6.99,12.06 6.99,14.73 17.78,10.16 20.32,17.78
  pour Bottom (isolate 0.305): 0,0 0,25.4 25.4,25.4 25.4,0
  pour Top (isolate 0.305): 0,0 0,25.4 25.4,25.4 25.4,0
GND1  (via drill 0.38)
  Top 0.178: v43.44,6.35 42.8,6.99 42.8,7.62 40.9,9.53 40.9,11.68 40.38,12.2 U1.10 38.98,12.2 38.86,12.32 38.86,13.08 38.98,13.2 U1.12
  Top 0.254: U1.5 36.34,11.7 36.2,11.56 36.2,10.54 v35.81,10.16
  other vias: 32.64,12.06 32.64,14.73 43.44,10.16 45.98,17.78
  pour Bottom (isolate 0.305): 25.66,0 25.66,25.4 51.06,25.4 51.06,0
  pour Top (isolate 0.305): 25.66,0 25.66,25.4 51.06,25.4 51.06,0
GND2  (via drill 0.38)
  Top 0.178: v69.09,6.35 68.45,6.99 68.45,7.62 66.55,9.53 66.55,11.68 66.03,12.2 U3.10 64.64,12.2 64.52,12.32 64.52,13.08 64.64,13.2 U3.12
  Top 0.254: U3.5 61.99,11.7 61.85,11.56 61.85,10.54 v61.47,10.16
  other vias: 58.3,12.06 58.3,14.73 69.09,10.16 71.63,17.78
  pour Bottom (isolate 0.305): 51.31,0 51.31,25.4 76.71,25.4 76.71,0
  pour Top (isolate 0.305): 51.31,0 51.31,25.4 76.71,25.4 76.71,0
GND3  (via drill 0.38)
  Top 0.178: v94.75,6.35 94.11,6.99 94.11,7.62 92.21,9.53 92.21,11.68 91.69,12.2 U4.10 90.29,12.2 90.17,12.32 90.17,13.08 90.29,13.2 U4.12
  Top 0.254: U4.5 87.65,11.7 87.51,11.56 87.51,10.54 v87.13,10.16
  other vias: 83.95,12.06 83.95,14.73 94.75,10.16 97.29,17.78
  pour Bottom (isolate 0.305): 76.97,0 76.97,25.4 102.37,25.4 102.37,0
  pour Top (isolate 0.305): 76.97,0 76.97,25.4 102.37,25.4 102.37,0
GND4  (via drill 0.38)
  Top 0.178: v17.78,32.01 17.14,32.64 17.14,33.27 15.24,35.18 15.24,37.34 14.72,37.85 U5.10 13.33,37.85 13.21,37.97 13.21,38.74 13.33,38.85 U5.12
  Top 0.254: U5.5 10.68,37.35 10.54,37.21 10.54,36.2 v10.16,35.81
  other vias: 6.99,37.72 6.99,40.39 17.78,35.82 20.32,43.44
  pour Bottom (isolate 0.305): 0,25.66 0,51.06 25.4,51.06 25.4,25.66
  pour Top (isolate 0.305): 0,25.66 0,51.06 25.4,51.06 25.4,25.66
GND5  (via drill 0.38)
  Top 0.178: v43.44,32.01 42.8,32.64 42.8,33.27 40.9,35.18 40.9,37.34 40.38,37.85 U6.10 38.98,37.85 38.86,37.97 38.86,38.74 38.98,38.85 U6.12
  Top 0.254: U6.5 36.34,37.35 36.2,37.21 36.2,36.2 v35.81,35.81
  other vias: 32.64,37.72 32.64,40.39 43.44,35.82 45.98,43.44
  pour Bottom (isolate 0.305): 25.66,25.66 25.66,51.06 51.06,51.06 51.06,25.66
  pour Top (isolate 0.305): 25.66,25.66 25.66,51.06 51.06,51.06 51.06,25.66
GND6  (via drill 0.38)
  Top 0.178: v69.09,32.01 68.45,32.64 68.45,33.27 66.55,35.18 66.55,37.34 66.03,37.85 U7.10 64.64,37.85 64.52,37.97 64.52,38.74 64.64,38.85 U7.12
  Top 0.254: U7.5 61.99,37.35 61.85,37.21 61.85,36.2 v61.47,35.81
  other vias: 58.3,37.72 58.3,40.39 69.09,35.82 71.63,43.44
  pour Bottom (isolate 0.305): 51.31,25.66 51.31,51.06 76.71,51.06 76.71,25.66
  pour Top (isolate 0.305): 51.31,25.66 51.31,51.06 76.71,51.06 76.71,25.66
GND7  (via drill 0.38)
  Top 0.178: v94.75,32.01 94.11,32.64 94.11,33.27 92.21,35.18 92.21,37.34 91.69,37.85 U8.10 90.29,37.85 90.17,37.97 90.17,38.74 90.29,38.85 U8.12
  Top 0.254: U8.5 87.65,37.35 87.51,37.21 87.51,36.2 v87.13,35.81
  other vias: 83.95,37.72 83.95,40.39 94.75,35.82 97.29,43.44
  pour Bottom (isolate 0.305): 76.97,25.66 76.97,51.06 102.37,51.06 102.37,25.66
  pour Top (isolate 0.305): 76.97,25.66 76.97,51.06 102.37,51.06 102.37,25.66
GND8  (via drill 0.38)
  Top 0.178: v17.78,57.66 17.14,58.3 17.14,58.93 15.24,60.84 15.24,62.99 14.72,63.51 U9.10 13.33,63.51 13.21,63.63 13.21,64.39 13.33,64.51 U9.12
  Top 0.254: U9.5 10.68,63.01 10.54,62.87 10.54,61.85 v10.16,61.47
  other vias: 6.99,63.38 6.99,66.04 17.78,61.47 20.32,69.09
  pour Bottom (isolate 0.305): 0,51.31 0,76.71 25.4,76.71 25.4,51.31
  pour Top (isolate 0.305): 0,51.31 0,76.71 25.4,76.71 25.4,51.31
GND9  (via drill 0.38)
  Top 0.178: v43.44,57.66 42.8,58.3 42.8,58.93 40.9,60.84 40.9,62.99 40.38,63.51 U10.10 38.98,63.51 38.86,63.63 38.86,64.39 38.98,64.51 U10.12
  Top 0.254: U10.5 36.34,63.01 36.2,62.87 36.2,61.85 v35.81,61.47
  other vias: 32.64,63.38 32.64,66.04 43.44,61.47 45.98,69.09
  pour Bottom (isolate 0.305): 25.66,51.31 25.66,76.71 51.06,76.71 51.06,51.31
  pour Top (isolate 0.305): 25.66,51.31 25.66,76.71 51.06,76.71 51.06,51.31
GND10  (via drill 0.38)
  Top 0.178: v69.09,57.66 68.45,58.3 68.45,58.93 66.55,60.84 66.55,62.99 66.03,63.51 U11.10 64.64,63.51 64.52,63.63 64.52,64.39 64.64,64.51 U11.12
  Top 0.254: U11.5 61.99,63.01 61.85,62.87 61.85,61.85 v61.47,61.47
  other vias: 58.3,63.38 58.3,66.04 69.09,61.47 71.63,69.09
  pour Bottom (isolate 0.305): 51.31,51.31 51.31,76.71 76.71,76.71 76.71,51.31
  pour Top (isolate 0.305): 51.31,51.31 51.31,76.71 76.71,76.71 76.71,51.31
GND11  (via drill 0.38)
  Top 0.178: v94.75,57.66 94.11,58.3 94.11,58.93 92.21,60.84 92.21,62.99 91.69,63.51 U12.10 90.29,63.51 90.17,63.63 90.17,64.39 90.29,64.51 U12.12
  Top 0.254: U12.5 87.65,63.01 87.51,62.87 87.51,61.85 v87.13,61.47
  other vias: 83.95,63.38 83.95,66.04 94.75,61.47 97.29,69.09
  pour Bottom (isolate 0.305): 76.97,51.31 76.97,76.71 102.37,76.71 102.37,51.31
  pour Top (isolate 0.305): 76.97,51.31 76.97,76.71 102.37,76.71 102.37,51.31
INT1
  Top 0.178: U2.11 14.99,12.7 15.62,12.06 15.62,9.78 19.05,6.35 J1.1
INT2
  Top 0.178: U2.9 14.59,11.7 14.86,11.43 14.86,9.27 16.51,7.62 J1.2
INT3
  Top 0.178: U1.9 40.24,11.7 40.51,11.43 40.51,9.27 42.16,7.62 J7.2
INT4
  Top 0.178: U1.11 40.64,12.7 41.28,12.06 41.28,9.78 44.7,6.35 J7.1
INT5
  Top 0.178: U3.9 65.9,11.7 66.17,11.43 66.17,9.27 67.82,7.62 J11.2
INT6
  Top 0.178: U3.11 66.3,12.7 66.93,12.06 66.93,9.78 70.36,6.35 J11.1
INT7
  Top 0.178: U4.9 91.56,11.7 91.83,11.43 91.83,9.27 93.48,7.62 J15.2
INT8
  Top 0.178: U4.11 91.95,12.7 92.59,12.06 92.59,9.78 96.02,6.35 J15.1
INT9
  Top 0.178: U5.9 14.59,37.35 14.86,37.09 14.86,34.93 16.51,33.27 J19.2
INT10
  Top 0.178: U5.11 14.99,38.35 15.62,37.72 15.62,35.43 19.05,32.01 J19.1
INT11
  Top 0.178: U6.9 40.24,37.35 40.51,37.09 40.51,34.93 42.16,33.27 J23.2
INT12
  Top 0.178: U6.11 40.64,38.35 41.28,37.72 41.28,35.43 44.7,32.01 J23.1
INT13
  Top 0.178: U7.9 65.9,37.35 66.17,37.09 66.17,34.93 67.82,33.27 J27.2
INT14
  Top 0.178: U7.11 66.3,38.35 66.93,37.72 66.93,35.43 70.36,32.01 J27.1
INT15
  Top 0.178: U8.9 91.56,37.35 91.83,37.09 91.83,34.93 93.48,33.27 J31.2
INT16
  Top 0.178: U8.11 91.95,38.35 92.59,37.72 92.59,35.43 96.02,32.01 J31.1
INT17
  Top 0.178: U9.9 14.59,63.01 14.86,62.74 14.86,60.58 16.51,58.93 J35.2
INT18
  Top 0.178: U9.11 14.99,64.01 15.62,63.38 15.62,61.09 19.05,57.66 J35.1
INT19
  Top 0.178: U10.9 40.24,63.01 40.51,62.74 40.51,60.58 42.16,58.93 J39.2
INT20
  Top 0.178: U10.11 40.64,64.01 41.28,63.38 41.28,61.09 44.7,57.66 J39.1
INT21
  Top 0.178: U11.9 65.9,63.01 66.17,62.74 66.17,60.58 67.82,58.93 J43.2
INT22
  Top 0.178: U11.11 66.3,64.01 66.93,63.38 66.93,61.09 70.36,57.66 J43.1
INT23
  Top 0.178: U12.9 91.56,63.01 91.83,62.74 91.83,60.58 93.48,58.93 J47.2
INT24
  Top 0.178: U12.11 91.95,64.01 92.59,63.38 92.59,61.09 96.02,57.66 J47.1
N$1
  Top 0.178: JP7.1 10.92,16.51 10.07,17.36 R5.2
N$2
  Top 0.178: JP7.3 14.48,16.51 15.33,17.36 R4.2
N$3
  Top 0.178: JP10.1 36.58,16.51 35.73,17.36 R3.2
N$4
  Top 0.178: JP10.3 40.13,16.51 40.98,17.36 R1.2
N$5
  Top 0.178: JP15.1 62.23,16.51 61.38,17.36 R8.2
N$6
  Top 0.178: JP15.3 65.79,16.51 66.64,17.36 R7.2
N$7
  Top 0.178: JP20.1 87.89,16.51 87.04,17.36 R11.2
N$8
  Top 0.178: JP20.3 91.44,16.51 92.29,17.36 R10.2
N$9
  Top 0.178: JP25.1 10.92,42.16 10.07,43.02 R14.2
N$10
  Top 0.178: JP25.3 14.48,42.16 15.33,43.02 R13.2
N$11
  Top 0.178: JP30.1 36.58,42.16 35.73,43.02 R17.2
N$12
  Top 0.178: JP30.3 40.13,42.16 40.98,43.02 R16.2
N$13
  Top 0.178: JP35.1 62.23,42.16 61.38,43.02 R20.2
N$14
  Top 0.178: JP35.3 65.79,42.16 66.64,43.02 R19.2
N$15
  Top 0.178: JP40.1 87.89,42.16 87.04,43.02 R23.2
N$16
  Top 0.178: JP40.3 91.44,42.16 92.29,43.02 R22.2
N$17
  Top 0.178: JP45.1 10.92,67.82 10.07,68.67 R26.2
N$18
  Top 0.178: JP45.3 14.48,67.82 15.33,68.67 R25.2
N$19
  Top 0.178: JP50.1 36.58,67.82 35.73,68.67 R29.2
N$20
  Top 0.178: JP50.3 40.13,67.82 40.98,68.67 R28.2
N$21
  Top 0.178: JP55.1 62.23,67.82 61.38,68.67 R32.2
N$22
  Top 0.178: JP55.3 65.79,67.82 66.64,68.67 R31.2
N$23
  Top 0.178: JP60.1 87.89,67.82 87.04,68.67 R35.2
N$24
  Top 0.178: JP60.3 91.44,67.82 92.29,68.67 R34.2
SA0  (via drill 0.38)
  Top 0.178: U2.7 12.7,10.29 11.85,9.44 R2.1 11.85,7.79 v11.05,6.99
  Bottom 0.178: SJ1.2 v11.05,6.99
SA1  (via drill 0.38)
  Top 0.178: U1.7 38.35,10.29 37.51,9.44 R6.1 37.51,7.79 v36.7,6.99
  Bottom 0.178: SJ2.2 v36.7,6.99
SA2  (via drill 0.38)
  Top 0.178: U3.7 64.01,10.29 63.16,9.44 R9.1 63.16,7.79 v62.36,6.99
  Bottom 0.178: SJ3.2 v62.36,6.99
SA3  (via drill 0.38)
  Top 0.178: U4.7 89.67,10.29 88.82,9.44 R12.1 88.82,7.79 v88.02,6.99
  Bottom 0.178: SJ4.2 v88.02,6.99
SA4  (via drill 0.38)
  Top 0.178: U5.7 12.7,35.94 11.85,35.09 R15.1 11.85,33.44 v11.05,32.64
  Bottom 0.178: SJ5.2 v11.05,32.64
SA5  (via drill 0.38)
  Top 0.178: U6.7 38.35,35.94 37.51,35.09 R18.1 37.51,33.44 v36.7,32.64
  Bottom 0.178: SJ6.2 v36.7,32.64
SA6  (via drill 0.38)
  Top 0.178: U7.7 64.01,35.94 63.16,35.09 R21.1 63.16,33.44 v62.36,32.64
  Bottom 0.178: SJ7.2 v62.36,32.64
SA7  (via drill 0.38)
  Top 0.178: U8.7 89.67,35.94 88.82,35.09 R24.1 88.82,33.44 v88.02,32.64
  Bottom 0.178: SJ8.2 v88.02,32.64
SA8  (via drill 0.38)
  Top 0.178: U9.7 12.7,61.6 11.85,60.75 R27.1 11.85,59.1 v11.05,58.3
  Bottom 0.178: SJ9.2 v11.05,58.3
SA9  (via drill 0.38)
  Top 0.178: U10.7 38.35,61.6 37.51,60.75 R30.1 37.51,59.1 v36.7,58.3
  Bottom 0.178: SJ10.2 v36.7,58.3
SA10  (via drill 0.38)
  Top 0.178: U11.7 64.01,61.6 63.16,60.75 R33.1 63.16,59.1 v62.36,58.3
  Bottom 0.178: SJ11.2 v62.36,58.3
SA11  (via drill 0.38)
  Top 0.178: U12.7 89.67,61.6 88.82,60.75 R36.1 88.82,59.1 v88.02,58.3
  Bottom 0.178: SJ12.2 v88.02,58.3
SCL  (via drill 0.38)
  Top 0.178: R4.1 17.61,15.66 19.07,14.2 J4.4 22.63,14.2 v22.86,13.97 | U2.4 10.17,12.2 9.78,11.81 9.78,11.05 9.14,10.41 8.89,10.41 | 8.89,10.41 7.11,10.41 6.33,11.2 J2.4 | 8.89,10.41 v8.89,7.62
  Bottom 0.178: v22.86,13.97 24.13,12.7 24.13,8.89 23.37,8.13 10.67,8.13 10.16,7.62 | J3.4 13.97,2.54 10.16,6.35 10.16,7.62 | 10.16,7.62 v8.89,7.62
SCL1  (via drill 0.38)
  Top 0.178: R1.1 43.27,15.66 44.73,14.2 J8.4 48.28,14.2 v48.52,13.97 | U1.4 35.82,12.2 35.43,11.81 35.43,11.05 34.8,10.41 34.55,10.41 | 34.55,10.41 32.77,10.41 31.98,11.2 J5.4 | 34.55,10.41 v34.55,7.62
  Bottom 0.178: v48.52,13.97 49.78,12.7 49.78,8.89 49.02,8.13 36.32,8.13 35.81,7.62 | J6.4 39.62,2.54 35.81,6.35 35.81,7.62 | 35.81,7.62 v34.55,7.62
SCL2  (via drill 0.38)
  Top 0.178: R7.1 68.92,15.66 70.38,14.2 J12.4 73.94,14.2 v74.17,13.97 | U3.4 61.48,12.2 61.09,11.81 61.09,11.05 60.45,10.41 60.2,10.41 | 60.2,10.41 58.42,10.41 57.64,11.2 J9.4 | 60.2,10.41 v60.2,7.62
  Bottom 0.178: v74.17,13.97 75.44,12.7 75.44,8.89 74.68,8.13 61.98,8.13 61.47,7.62 | J10.4 65.28,2.54 61.47,6.35 61.47,7.62 | 61.47,7.62 v60.2,7.62
SCL3  (via drill 0.38)
  Top 0.178: R10.1 94.58,15.66 96.04,14.2 J16.4 99.6,14.2 v99.83,13.97 | U4.4 87.13,12.2 86.75,11.81 86.75,11.05 86.11,10.41 85.86,10.41 | 85.86,10.41 84.08,10.41 83.29,11.2 J13.4 | 85.86,10.41 v85.86,7.62
  Bottom 0.178: v99.83,13.97 101.1,12.7 101.1,8.89 100.33,8.13 87.63,8.13 87.13,7.62 | J14.4 90.94,2.54 87.13,6.35 87.13,7.62 | 87.13,7.62 v85.86,7.62
SCL4  (via drill 0.38)
  Top 0.178: R13.1 17.61,41.31 19.07,39.85 J20.4 22.63,39.85 v22.86,39.62 | U5.4 10.17,37.85 9.78,37.47 9.78,36.7 9.14,36.07 8.89,36.07 | 8.89,36.07 7.11,36.07 6.33,36.85 J17.4 | 8.89,36.07 v8.89,33.27
  Bottom 0.178: v22.86,39.62 24.13,38.35 24.13,34.55 23.37,33.78 10.67,33.78 10.16,33.27 | J18.4 13.97,28.2 10.16,32.01 10.16,33.27 | 10.16,33.27 v8.89,33.27
SCL5  (via drill 0.38)
  Top 0.178: R16.1 43.27,41.31 44.73,39.85 J24.4 48.28,39.85 v48.52,39.62 | U6.4 35.82,37.85 35.43,37.47 35.43,36.7 34.8,36.07 34.55,36.07 | 34.55,36.07 32.77,36.07 31.98,36.85 J21.4 | 34.55,36.07 v34.55,33.27
  Bottom 0.178: v48.52,39.62 49.78,38.35 49.78,34.55 49.02,33.78 36.32,33.78 35.81,33.27 | J22.4 39.62,28.2 35.81,32.01 35.81,33.27 | 35.81,33.27 v34.55,33.27
SCL6  (via drill 0.38)
  Top 0.178: R19.1 68.92,41.31 70.38,39.85 J28.4 73.94,39.85 v74.17,39.62 | U7.4 61.48,37.85 61.09,37.47 61.09,36.7 60.45,36.07 60.2,36.07 | 60.2,36.07 58.42,36.07 57.64,36.85 J25.4 | 60.2,36.07 v60.2,33.27
  Bottom 0.178: v74.17,39.62 75.44,38.35 75.44,34.55 74.68,33.78 61.98,33.78 61.47,33.27 | J26.4 65.28,28.2 61.47,32.01 61.47,33.27 | 61.47,33.27 v60.2,33.27
SCL7  (via drill 0.38)
  Top 0.178: R22.1 94.58,41.31 96.04,39.85 J32.4 99.6,39.85 v99.83,39.62 | U8.4 87.13,37.85 86.75,37.47 86.75,36.7 86.11,36.07 85.86,36.07 | 85.86,36.07 84.08,36.07 83.29,36.85 J29.4 | 85.86,36.07 v85.86,33.27
  Bottom 0.178: v99.83,39.62 101.1,38.35 101.1,34.55 100.33,33.78 87.63,33.78 87.13,33.27 | J30.4 90.94,28.2 87.13,32.01 87.13,33.27 | 87.13,33.27 v85.86,33.27
SCL8  (via drill 0.38)
  Top 0.178: R25.1 17.61,66.97 19.07,65.51 J36.4 22.63,65.51 v22.86,65.28 | U9.4 10.17,63.51 9.78,63.12 9.78,62.36 9.14,61.72 8.89,61.72 | 8.89,61.72 7.11,61.72 6.33,62.51 J33.4 | 8.89,61.72 v8.89,58.93
  Bottom 0.178: v22.86,65.28 24.13,64.01 24.13,60.2 23.37,59.44 10.67,59.44 10.16,58.93 | J34.4 13.97,53.85 10.16,57.66 10.16,58.93 | 10.16,58.93 v8.89,58.93
SCL9  (via drill 0.38)
  Top 0.178: R28.1 43.27,66.97 44.73,65.51 J40.4 48.28,65.51 v48.52,65.28 | U10.4 35.82,63.51 35.43,63.12 35.43,62.36 34.8,61.72 34.55,61.72 | 34.55,61.72 32.77,61.72 31.98,62.51 J37.4 | 34.55,61.72 v34.55,58.93
  Bottom 0.178: v48.52,65.28 49.78,64.01 49.78,60.2 49.02,59.44 36.32,59.44 35.81,58.93 | J38.4 39.62,53.85 35.81,57.66 35.81,58.93 | 35.81,58.93 v34.55,58.93
SCL10  (via drill 0.38)
  Top 0.178: R31.1 68.92,66.97 70.38,65.51 J44.4 73.94,65.51 v74.17,65.28 | U11.4 61.48,63.51 61.09,63.12 61.09,62.36 60.45,61.72 60.2,61.72 | 60.2,61.72 58.42,61.72 57.64,62.51 J41.4 | 60.2,61.72 v60.2,58.93
  Bottom 0.178: v74.17,65.28 75.44,64.01 75.44,60.2 74.68,59.44 61.98,59.44 61.47,58.93 | J42.4 65.28,53.85 61.47,57.66 61.47,58.93 | 61.47,58.93 v60.2,58.93
SCL11  (via drill 0.38)
  Top 0.178: R34.1 94.58,66.97 96.04,65.51 J48.4 99.6,65.51 v99.83,65.28 | U12.4 87.13,63.51 86.75,63.12 86.75,62.36 86.11,61.72 85.86,61.72 | 85.86,61.72 84.08,61.72 83.29,62.51 J45.4 | 85.86,61.72 v85.86,58.93
  Bottom 0.178: v99.83,65.28 101.1,64.01 101.1,60.2 100.33,59.44 87.63,59.44 87.13,58.93 | J46.4 90.94,53.85 87.13,57.66 87.13,58.93 | 87.13,58.93 v85.86,58.93
SDA  (via drill 0.38)
  Top 0.178: U2.6 12.2,10.93 v11.43,10.16 | J4.3 22.36,13.2 v22.86,12.7 | J2.3 3.04,12.2 v2.54,12.7 2.54,13.97 4.23,15.66 R5.1
  Bottom 0.178: v22.86,12.7 22.86,10.16 21.59,8.89 11.43,8.89 | 11.43,8.89 7.62,8.89 | 7.62,8.89 3.81,8.89 2.54,10.16 v2.54,12.7 | J3.3 11.43,2.54 7.62,6.35 7.62,8.89 | v11.43,10.16 11.43,8.89
SDA1  (via drill 0.38)
  Top 0.178: U1.6 37.85,10.93 v37.09,10.16 | J8.3 48.02,13.2 v48.52,12.7 | J5.3 28.7,12.2 v28.2,12.7 28.2,13.97 29.89,15.66 R3.1
  Bottom 0.178: v48.52,12.7 48.52,10.16 47.24,8.89 37.09,8.89 | 37.09,8.89 33.27,8.89 | 33.27,8.89 29.46,8.89 28.2,10.16 v28.2,12.7 | J6.3 37.09,2.54 33.27,6.35 33.27,8.89 | v37.09,10.16 37.09,8.89
SDA2  (via drill 0.38)
  Top 0.178: U3.6 63.51,10.93 v62.74,10.16 | J12.3 73.67,13.2 v74.17,12.7 | J9.3 54.35,12.2 v53.85,12.7 53.85,13.97 55.54,15.66 R8.1
  Bottom 0.178: v74.17,12.7 74.17,10.16 72.9,8.89 62.74,8.89 | 62.74,8.89 58.93,8.89 | 58.93,8.89 55.12,8.89 53.85,10.16 v53.85,12.7 | J10.3 62.74,2.54 58.93,6.35 58.93,8.89 | v62.74,10.16 62.74,8.89
SDA3  (via drill 0.38)
  Top 0.178: U4.6 89.17,10.93 v88.4,10.16 | J16.3 99.33,13.2 v99.83,12.7 | J13.3 80.01,12.2 v79.51,12.7 79.51,13.97 81.2,15.66 R11.1
  Bottom 0.178: v99.83,12.7 99.83,10.16 98.56,8.89 88.4,8.89 | 88.4,8.89 84.59,8.89 | 84.59,8.89 80.78,8.89 79.51,10.16 v79.51,12.7 | J14.3 88.4,2.54 84.59,6.35 84.59,8.89 | v88.4,10.16 88.4,8.89
SDA4  (via drill 0.38)
  Top 0.178: U5.6 12.2,36.59 v11.43,35.81 | J20.3 22.36,38.85 v22.86,38.35 | J17.3 3.04,37.85 v2.54,38.35 2.54,39.62 4.23,41.31 R14.1
  Bottom 0.178: v22.86,38.35 22.86,35.81 21.59,34.55 11.43,34.55 | 11.43,34.55 7.62,34.55 | 7.62,34.55 3.81,34.55 2.54,35.81 v2.54,38.35 | J18.3 11.43,28.2 7.62,32.01 7.62,34.55 | v11.43,35.81 11.43,34.55
SDA5  (via drill 0.38)
  Top 0.178: U6.6 37.85,36.59 v37.09,35.81 | J24.3 48.02,38.85 v48.52,38.35 | J21.3 28.7,37.85 v28.2,38.35 28.2,39.62 29.89,41.31 R17.1
  Bottom 0.178: v48.52,38.35 48.52,35.81 47.24,34.55 37.09,34.55 | 37.09,34.55 33.27,34.55 | 33.27,34.55 29.46,34.55 28.2,35.81 v28.2,38.35 | J22.3 37.09,28.2 33.27,32.01 33.27,34.55 | v37.09,35.81 37.09,34.55
SDA6  (via drill 0.38)
  Top 0.178: U7.6 63.51,36.59 v62.74,35.81 | J28.3 73.67,38.85 v74.17,38.35 | J25.3 54.35,37.85 v53.85,38.35 53.85,39.62 55.54,41.31 R20.1
  Bottom 0.178: v74.17,38.35 74.17,35.81 72.9,34.55 62.74,34.55 | 62.74,34.55 58.93,34.55 | 58.93,34.55 55.12,34.55 53.85,35.81 v53.85,38.35 | J26.3 62.74,28.2 58.93,32.01 58.93,34.55 | v62.74,35.81 62.74,34.55
SDA7  (via drill 0.38)
  Top 0.178: U8.6 89.17,36.59 v88.4,35.81 | J32.3 99.33,38.85 v99.83,38.35 | J29.3 80.01,37.85 v79.51,38.35 79.51,39.62 81.2,41.31 R23.1
  Bottom 0.178: v99.83,38.35 99.83,35.81 98.56,34.55 88.4,34.55 | 88.4,34.55 84.59,34.55 | 84.59,34.55 80.78,34.55 79.51,35.81 v79.51,38.35 | J30.3 88.4,28.2 84.59,32.01 84.59,34.55 | v88.4,35.81 88.4,34.55
SDA8  (via drill 0.38)
  Top 0.178: U9.6 12.2,62.24 v11.43,61.47 | J36.3 22.36,64.51 v22.86,64.01 | J33.3 3.04,63.51 v2.54,64.01 2.54,65.28 4.23,66.97 R26.1
  Bottom 0.178: v22.86,64.01 22.86,61.47 21.59,60.2 11.43,60.2 | 11.43,60.2 7.62,60.2 | 7.62,60.2 3.81,60.2 2.54,61.47 v2.54,64.01 | J34.3 11.43,53.85 7.62,57.66 7.62,60.2 | v11.43,61.47 11.43,60.2
SDA9  (via drill 0.38)
  Top 0.178: U10.6 37.85,62.24 v37.09,61.47 | J40.3 48.02,64.51 v48.52,64.01 | J37.3 28.7,63.51 v28.2,64.01 28.2,65.28 29.89,66.97 R29.1
  Bottom 0.178: v48.52,64.01 48.52,61.47 47.24,60.2 37.09,60.2 | 37.09,60.2 33.27,60.2 | 33.27,60.2 29.46,60.2 28.2,61.47 v28.2,64.01 | J38.3 37.09,53.85 33.27,57.66 33.27,60.2 | v37.09,61.47 37.09,60.2
SDA10  (via drill 0.38)
  Top 0.178: U11.6 63.51,62.24 v62.74,61.47 | J44.3 73.67,64.51 v74.17,64.01 | J41.3 54.35,63.51 v53.85,64.01 53.85,65.28 55.54,66.97 R32.1
  Bottom 0.178: v74.17,64.01 74.17,61.47 72.9,60.2 62.74,60.2 | 62.74,60.2 58.93,60.2 | 58.93,60.2 55.12,60.2 53.85,61.47 v53.85,64.01 | J42.3 62.74,53.85 58.93,57.66 58.93,60.2 | v62.74,61.47 62.74,60.2
SDA11  (via drill 0.38)
  Top 0.178: U12.6 89.17,62.24 v88.4,61.47 | J48.3 99.33,64.51 v99.83,64.01 | J45.3 80.01,63.51 v79.51,64.01 79.51,65.28 81.2,66.97 R35.1
  Bottom 0.178: v99.83,64.01 99.83,61.47 98.56,60.2 88.4,60.2 | 88.4,60.2 84.59,60.2 | 84.59,60.2 80.78,60.2 79.51,61.47 v79.51,64.01 | J46.3 88.4,53.85 84.59,57.66 84.59,60.2 | v88.4,61.47 88.4,60.2

## Text on the board
tPlace: MMA8452 / Accelerometer | MMA8452 / Accelerometer | MMA8452 / Accelerometer | MMA8452 / Accelerometer | X | X | X | X | Z | Z | Z | Z | Y | Y | Y | Y | GND | 3.3V | SDA | SCL | I2 | I1 | GND | 3.3V | SDA | SCL | I2 | I1 | GND | 3.3V | SDA | SCL | I2 | I1 | GND | 3.3V | SDA | SCL | I2 | I1 | MMA8452 / Accelerometer | MMA8452 / Accelerometer | MMA8452 / Accelerometer | MMA8452 / Accelerometer | X | X | X | X | Z | Z | Z | Z | Y | Y | Y | Y | GND | 3.3V | SDA | SCL | I2 | I1 | GND | 3.3V | SDA | SCL | I2 | I1 | GND | 3.3V | SDA | SCL | I2 | I1 | GND | 3.3V | SDA | SCL | I2 | I1 | MMA8452 / Accelerometer | MMA8452 / Accelerometer | MMA8452 / Accelerometer | MMA8452 / Accelerometer | X | X | X | X | Z | Z | Z | Z | Y | Y | Y | Y | GND | 3.3V | SDA | SCL | I2 | I1 | GND | 3.3V | SDA | SCL | I2 | I1 | GND | 3.3V | SDA | SCL | I2 | I1 | GND | 3.3V | SDA | SCL | I2 | I1
bPlace: MMA8452 / Accelerometer | MMA8452 / Accelerometer | MMA8452 / Accelerometer | MMA8452 / Accelerometer | X | X | X | X | Z | Z | Z | Z | Y | Y | Y | Y | I2C ADR | I2C ADR | I2C ADR | I2C ADR | GND | 3.3V | SDA | SCL | I2 | I1 | GND | 3.3V | SDA | SCL | I2 | I1 | GND | 3.3V | SDA | SCL | I2 | I1 | GND | 3.3V | SDA | SCL | I2 | I1 | MMA8452 / Accelerometer | MMA8452 / Accelerometer | MMA8452 / Accelerometer | MMA8452 / Accelerometer | X | X | X | X | Z | Z | Z | Z | Y | Y | Y | Y | I2C ADR | I2C ADR | I2C ADR | I2C ADR | GND | 3.3V | SDA | SCL | I2 | I1 | GND | 3.3V | SDA | SCL | I2 | I1 | GND | 3.3V | SDA | SCL | I2 | I1 | GND | 3.3V | SDA | SCL | I2 | I1 | MMA8452 / Accelerometer | MMA8452 / Accelerometer | MMA8452 / Accelerometer | MMA8452 / Accelerometer | X | X | X | X | Z | Z | Z | Z | Y | Y | Y | Y | I2C ADR | I2C ADR | I2C ADR | I2C ADR | GND | 3.3V | SDA | SCL | I2 | I1 | GND | 3.3V | SDA | SCL | I2 | I1 | GND | 3.3V | SDA | SCL | I2 | I1 | GND | 3.3V | SDA | SCL | I2 | I1
Milling: vscore